# Altium PCB PCB_MiniCVGATEcontroller_2023-04-24.pcbdoc
Units mil, origin at the board's own origin, x right, y up, seen from the top; angles counter-clockwise.
Board outline 5521.01 x 5819.62 mil, 2 copper layers (Top Layer, Bottom Layer); 79 components, 56 nets, 267 pads, 25 vias.
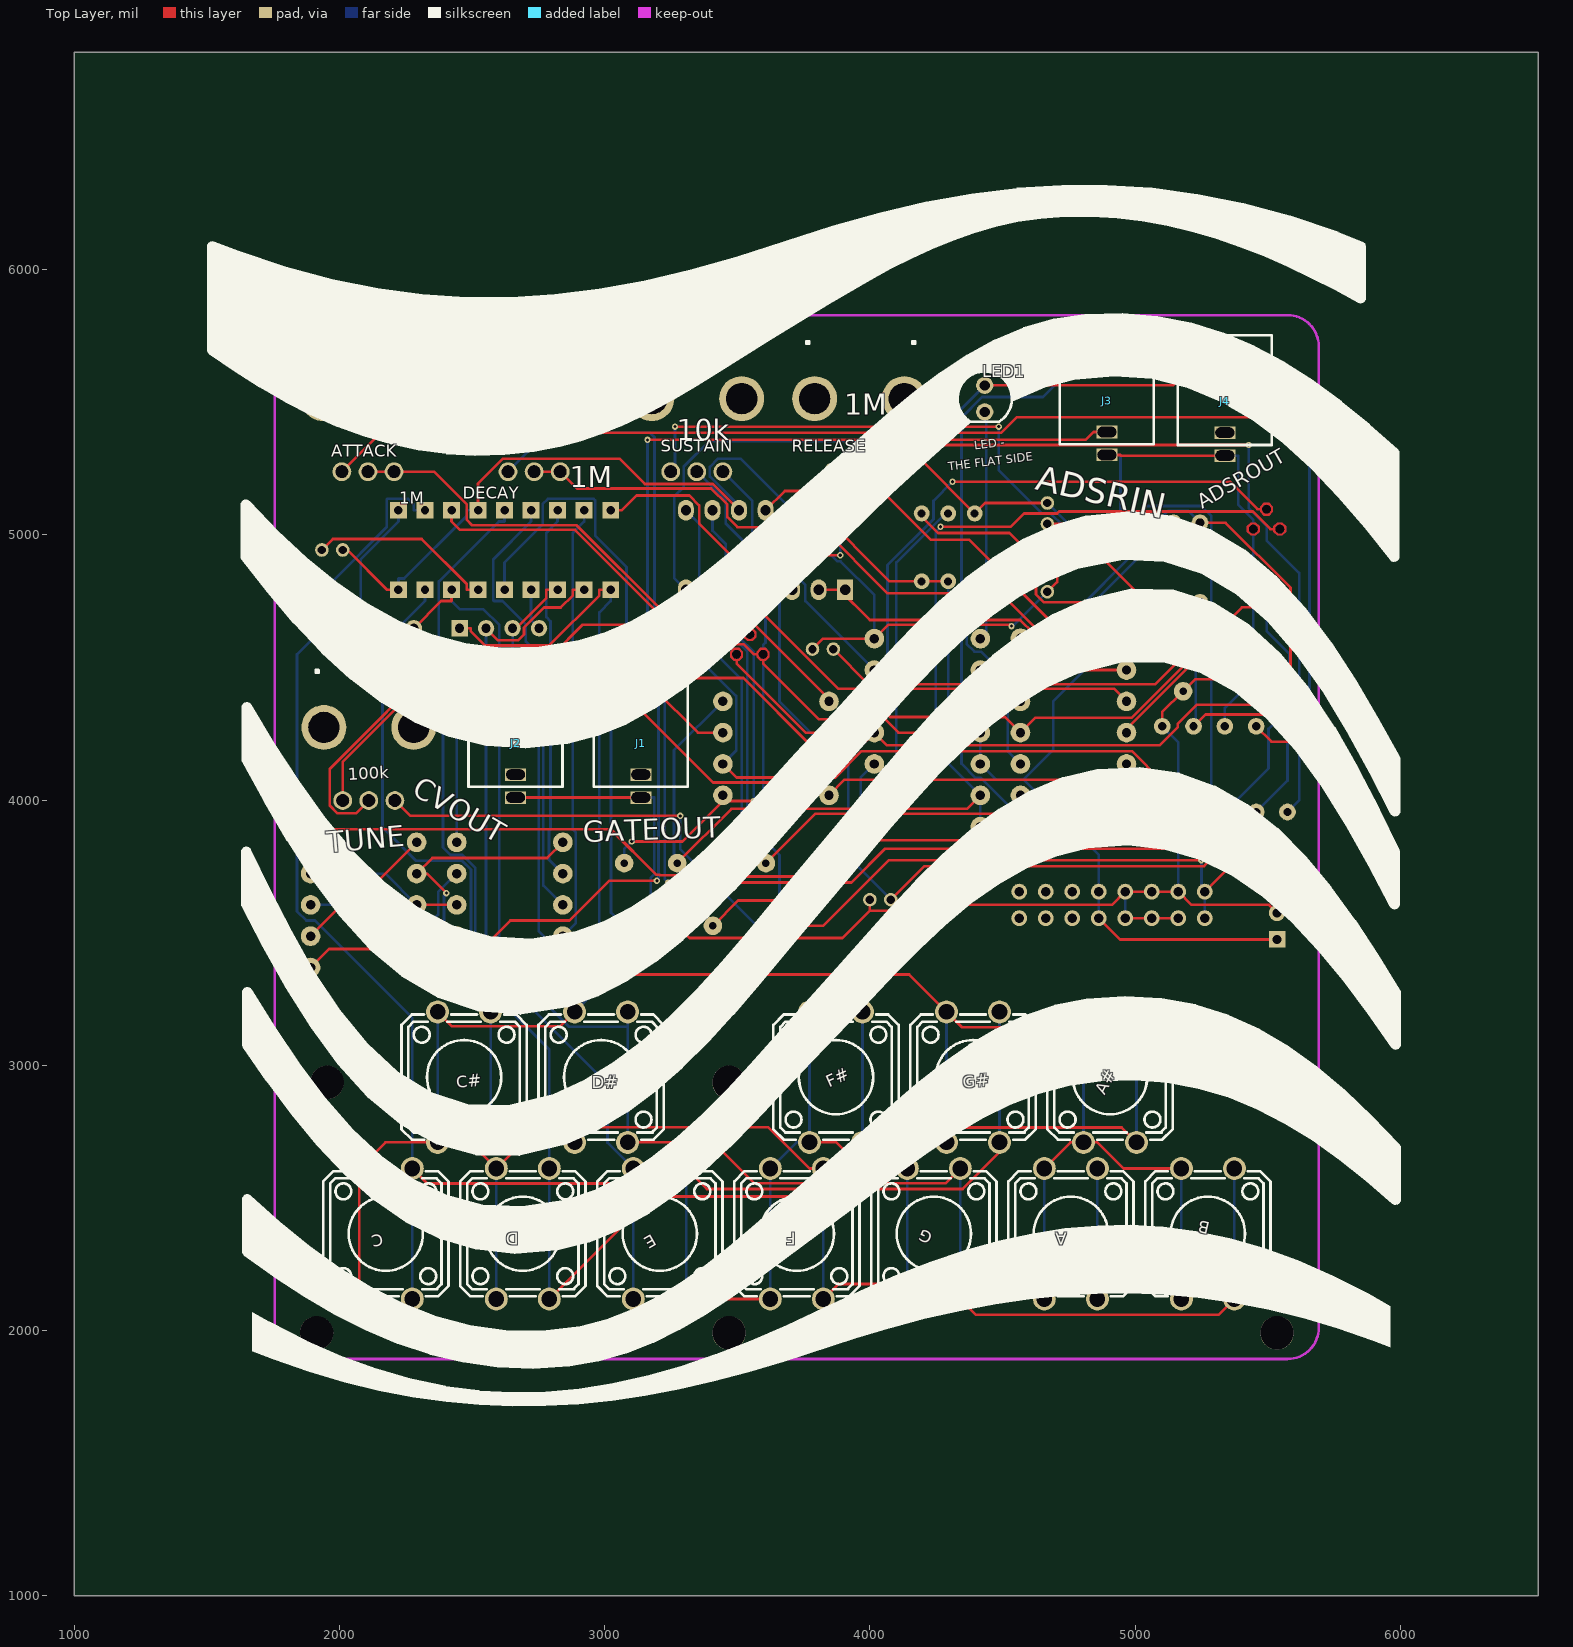
[diagram p0: Top Layer view]
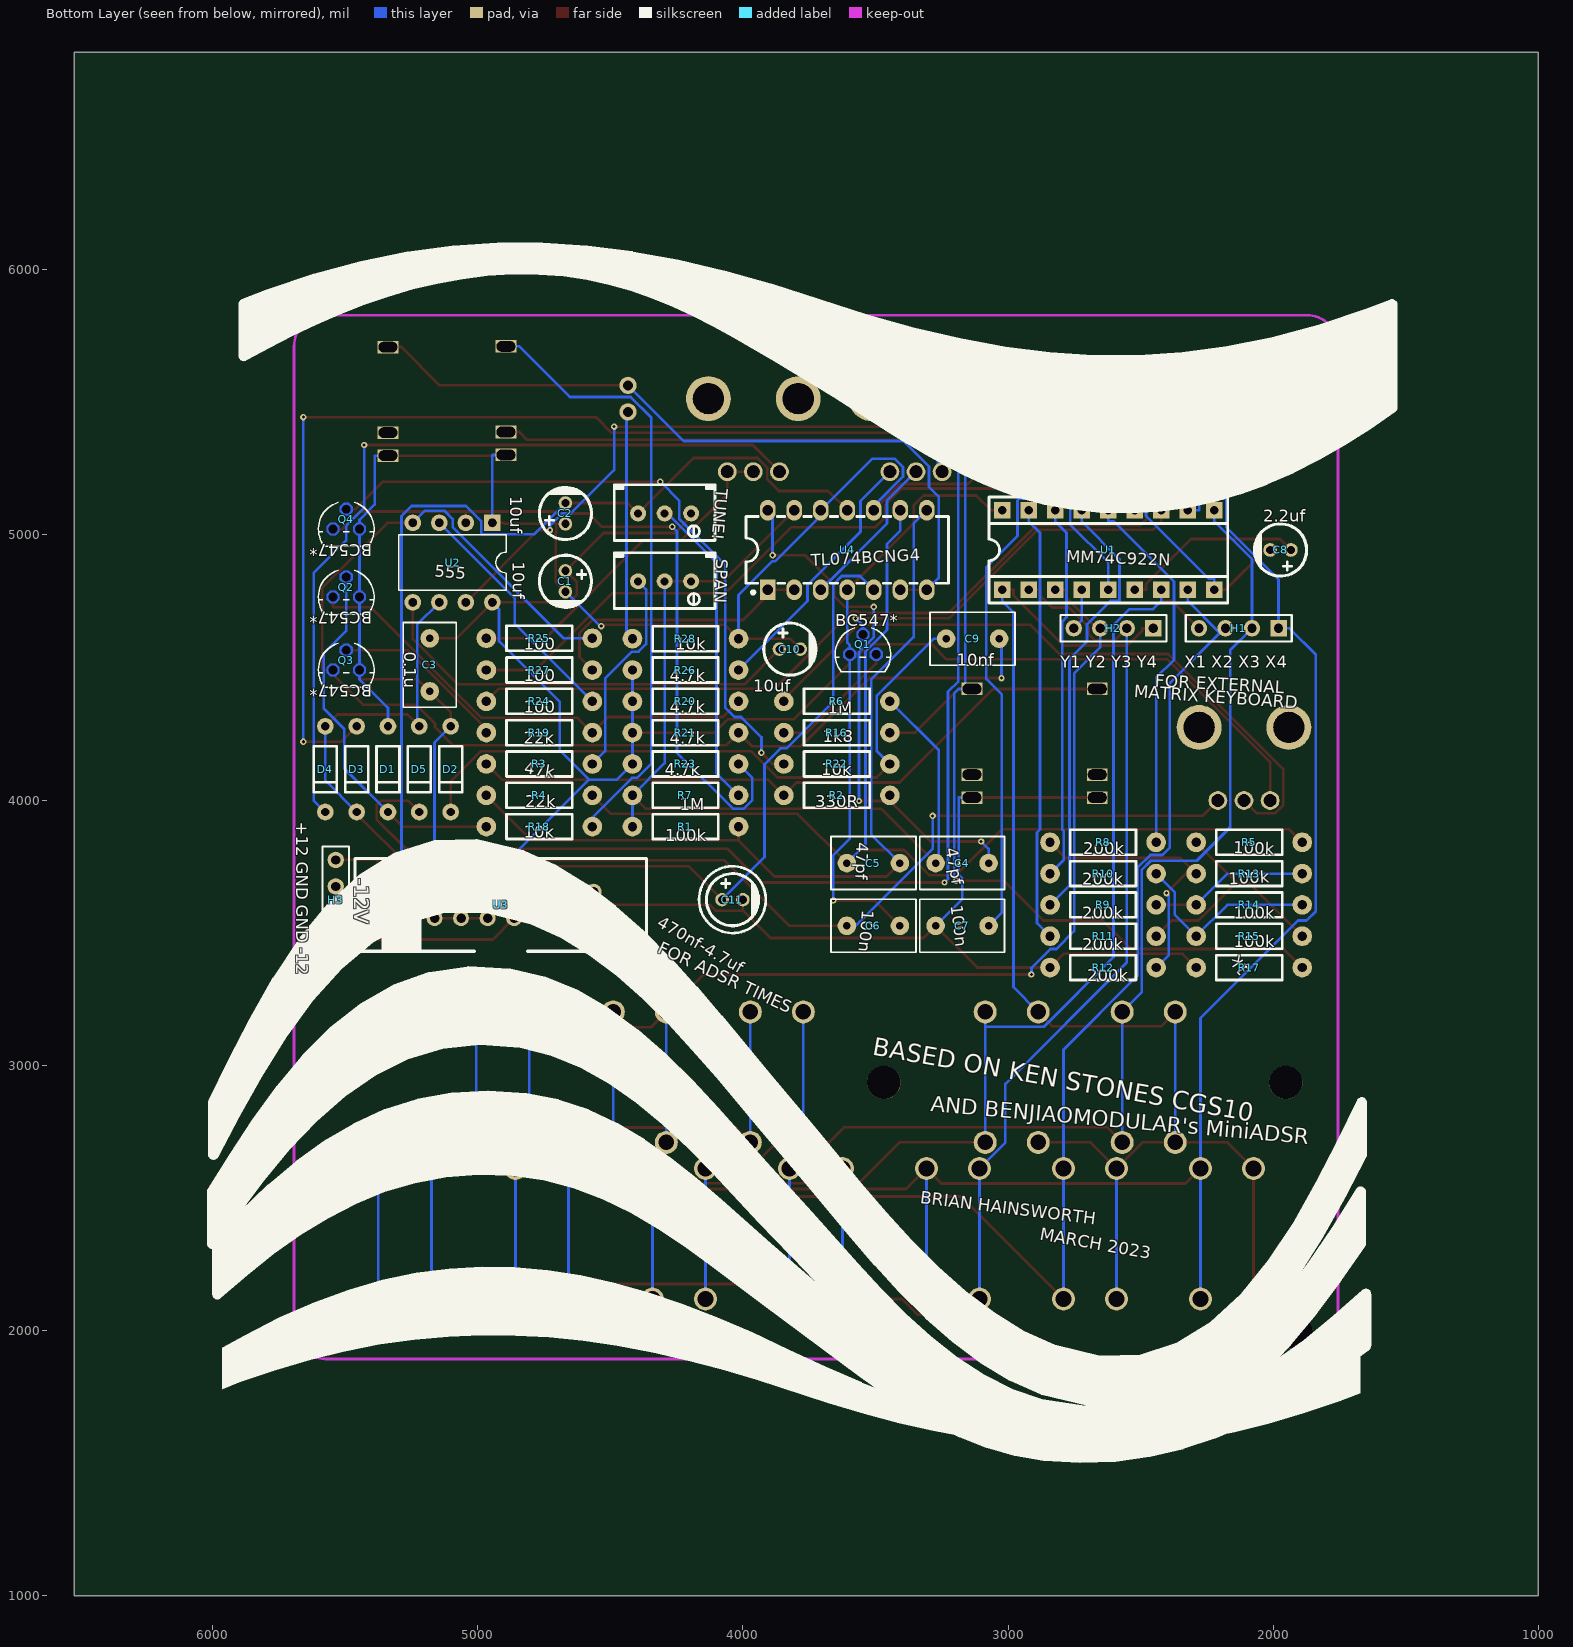
[diagram p1: Bottom Layer view, seen from below]

## Layer stack, top to bottom
Top Layer: signal copper (thickness not stored)
Dielectric: dielectric 12.6, FR-4, Dk 4.8
Bottom Layer: signal copper (thickness not stored)

## Board outline
6521.01,1000 1000,1000 1000,6819.62 6521.01,6819.62

## Components (designator, comment, footprint, x,y, rotation, side; value= is the part's Value field where it differs from the comment)
A "K4-12×12_TH" KEY-TH_4P-L12.0-W12.0-P5.00-LS12.5 4757.91,2364.49 r90 top
A# "K4-12×12_TH" KEY-TH_4P-L12.0-W12.0-P5.00-LS12.5 4905.51,2955.09 r90 top
ATTACK "1M" ALPHA9MMPOT-NOOUTLINE 2106.91,5730.69 r0 top
B "K4-12×12_TH" KEY-TH_4P-L12.0-W12.0-P5.00-LS12.5 5274.61,2364.49 r90 top
C "K4-12×12_TH" KEY-TH_4P-L12.0-W12.0-P5.00-LS12.5 2174.21,2364.49 r90 top
C1 "10uf" CAP-D5.0×F2.0 4669.29,4825.16 r90 bottom
C2 "10uf" CAP-D5.0×F2.0 4669.29,5081.06 r270 bottom
C3 "0.1u" RAD-0.2 5181.1,4510.2 r90 bottom
C4 "47pf" RAD-0.2 3173.23,3762.17 r180 bottom
C5 "47pf" RAD-0.2 3507.87,3762.17 r180 bottom
C6 "100n" RAD-0.2 3507.87,3525.95 r180 bottom
C7 "100n" RAD-0.2 3173.23,3525.95 r180 bottom
C8 "2.2uf" CAP-D5.0×F2.0 1972.44,4943.27 r180 bottom
C9 "10nf" RAD-0.2 3133.86,4608.62 r0 bottom
C10 "10uf" CAP-D5.0×F2.0 3822.83,4569.25 r0 bottom
C11 "470nf-4.7uf" CAP-D5.0×F2.0 4039.37,3624.37 r0 bottom
C# "K4-12×12_TH" KEY-TH_4P-L12.0-W12.0-P5.00-LS12.5 2469.51,2955.09 r90 top
D "K4-12×12_TH" KEY-TH_4P-L12.0-W12.0-P5.00-LS12.5 2690.91,2364.49 r90 top
D1 "1N4148" DO-35_BD2.0-L4.2-P8.20-D0.5-RD 5338.58,4116.5 r270 bottom
D2 "1N4148" DO-35_BD2.0-L4.2-P8.20-D0.5-RD 5102.36,4116.5 r270 bottom
D3 "1N4148" DO-35_BD2.0-L4.2-P8.20-D0.5-RD 5456.69,4116.5 r270 bottom
D4 "1N4148" DO-35_BD2.0-L4.2-P8.20-D0.5-RD 5574.8,4116.5 r270 bottom
D5 "1N4148" DO-35_BD2.0-L4.2-P8.20-D0.5-RD 5220.47,4116.5 r270 bottom
D# "K4-12×12_TH" KEY-TH_4P-L12.0-W12.0-P5.00-LS12.5 2986.21,2955.09 r90 top
DECAY "1M" ALPHA9MMPOT-NOOUTLINE 2733.51,5730.69 r0 top
E "K4-12×12_TH" KEY-TH_4P-L12.0-W12.0-P5.00-LS12.5 3207.71,2364.49 r90 top
F "K4-12×12_TH" KEY-TH_4P-L12.0-W12.0-P5.00-LS12.5 3724.41,2364.49 r90 top
F# "K4-12×12_TH" KEY-TH_4P-L12.0-W12.0-P5.00-LS12.5 3872.01,2955.09 r90 top
G "K4-12×12_TH" KEY-TH_4P-L12.0-W12.0-P5.00-LS12.5 4241.11,2364.49 r90 top
G# "K4-12×12_TH" KEY-TH_4P-L12.0-W12.0-P5.00-LS12.5 4388.81,2955.09 r90 top
H1 "X1 X2 X3 X4" HDR-F-2.54_1X4 2129.92,4647.99 r180 bottom
H2 "Y1 Y2 Y3 Y4" HDR-F-2.54_1X4 2602.36,4647.99 r180 bottom
H3 "+12 GND GND -12" HDR-F-2.54_1X4 5535.43,3624.37 r270 bottom
J1 "GATEOUT" PJ-3001F 3136.02,4251.81 r270 top
J2 "CVOUT" PJ-3001F 2663.52,4251.81 r270 top
J3 "ADSRIN" PJ-3001F 4893.75,5543.66 r270 top
J4 "ADSROUT" PJ-3001F 5338.58,5541.17 r270 top
LED1 "LED-TH-5mm_R" LED-TH_BD5.0_RED 4433.07,5514.13 r0 top
Q1 "BC547*" TO92 3547.24,4549.57 r0 bottom
Q2 "BC547*" TO92 5496.06,4766.1 r0 bottom
Q3 "BC547*" TO92 5496.06,4490.51 r0 bottom
Q4 "BC547*" TO92 5496.06,5022.01 r0 bottom
R1 "100k" R_AXIAL-0.4 4216.53,3899.96 r180 bottom
R2 "330R" R_AXIAL-0.4 3645.67,4018.07 r180 bottom
R3 "47k" R_AXIAL-0.4 4767.71,4136.18 r180 bottom
R4 "22k" R_AXIAL-0.4 4767.71,4018.07 r180 bottom
R5 "100k" R_AXIAL-0.4 2090.55,3840.91 r0 bottom
R6 "1M" R_AXIAL-0.4 3645.67,4372.4 r0 bottom
R7 "1M" R_AXIAL-0.4 4216.53,4018.07 r180 bottom
R8 "200k" R_AXIAL-0.4 2641.73,3840.91 r180 bottom
R9 "200k" R_AXIAL-0.4 2641.73,3604.69 r0 bottom
R10 "200k" R_AXIAL-0.4 2641.73,3722.8 r0 bottom
R11 "200k" R_AXIAL-0.4 2641.73,3486.58 r0 bottom
R12 "200k" R_AXIAL-0.4 2641.73,3368.47 r180 bottom
R13 "100k" R_AXIAL-0.4 2090.55,3722.8 r180 bottom
R14 "100k" R_AXIAL-0.4 2090.55,3604.69 r180 bottom
R15 "100k" R_AXIAL-0.4 2090.55,3486.58 r180 bottom
R16 "1k8" R_AXIAL-0.4 3645.67,4254.29 r180 bottom
R17 "1k" R_AXIAL-0.4 2090.55,3368.47 r0 bottom
R18 "10k" R_AXIAL-0.4 4767.71,3899.96 r180 bottom
R19 "22k" R_AXIAL-0.4 4767.71,4254.29 r180 bottom
R20 "4.7k" R_AXIAL-0.4 4216.53,4372.4 r180 bottom
R21 "4.7k" R_AXIAL-0.4 4216.53,4254.29 r180 bottom
R22 "10k" R_AXIAL-0.4 3645.67,4136.18 r180 bottom
R23 "4.7k" R_AXIAL-0.4 4216.53,4136.18 r180 bottom
R24 "100" R_AXIAL-0.4 4767.71,4372.4 r180 bottom
R25 "100" R_AXIAL-0.4 4767.71,4610.37 r180 bottom
R26 "4.7k" R_AXIAL-0.4 4216.53,4490.51 r180 bottom
R27 "100" R_AXIAL-0.4 4767.71,4490.51 r180 bottom
R28 "10k" R_AXIAL-0.4 4216.53,4608.62 r180 bottom
RELEASE "1M" ALPHA9MMPOT-NOOUTLINE 3960.61,5730.69 r0 top
SPAN "100k" RES-ADJ-TH_3296W 4295.24,4825.19 r90 bottom
SUSTAIN "10k" ALPHA9MMPOT-NOOUTLINE 3347.11,5730.69 r0 top
TUNE "100k" ALPHA9MMPOT-NOOUTLINE 2110.21,4490.49 r0 top
TUNE! "100k" RES-ADJ-TH_3296W 4295.24,5081.09 r90 bottom
U1 "MM74C922N" DIP-18 2622.05,4943.27 r0 bottom
U2 "555" DIP-8_W7.62MM 1047.25,-785.07 r270 bottom
U3 "EURORACK 16 PIN POWER" "EURORACK SHROUDED POWER 16 PIN" 5062.99,3604.69 r90 bottom
U4 "TL074BCNG4" PDIP-14_L19.3-W6.4-P2.54-LS7.9-BL-1 3606.3,4943.27 r0 bottom

## Footprints (in the part's own frame and the unit in brackets; to place one, negate y for a bottom-side part, rotate by r counter-clockwise, add the part's x,y. Pads: shape width x height; smd on the part's side, far side on the other; paste and mask are expansions set on the pad)
ALPHA9MMPOT-NOOUTLINE [mil]
  round 70.87 hole 47.24 slot 47.44 at 0 deg: 1(-98.42,-492.12) 2(0,-492.12) 3(98.42,-492.12)
  round 169.29 hole 116.92 slot 116.93 at 0 deg: 4(169.29,-216.54) 5(-169.29,-216.54)
  silkscreen extent -200,-10 210,0
CAP-D5.0×F2.0 [mm]
  round 1.3 hole 0.8: 1(1,0) 2(-1,0)
  silkscreen extent -2.5,-2.5 2.5,2.5
DIP-8_W7.62MM [mil]
  rect 62.99x62.99 hole 31.5 slot 31.7 at 0 deg: 1(-5830.7,-3897.63)
  round 62.99 hole 31.5 slot 31.7 at 0 deg: 2(-5830.7,-3997.63) 3(-5830.7,-4097.63) 4(-5830.7,-4197.63) 5(-5530.7,-4197.63) 6(-5530.7,-4097.63) 7(-5530.7,-3997.63) 8(-5530.7,-3897.63)
  silkscreen extent -5785,-4250 -5576,-3845
DIP-18 [mil]
  rect 63x63 hole 32: 1(400,150) 2(300,150) 3(200,150) 4(100,150) 5(0,150) 6(-100,150) 7(-200,150) 8(-300,150) 9(-400,150) 10(-400,-150) 11(-300,-150) 12(-200,-150) 13(-100,-150) 14(0,-150) 15(100,-150) 16(200,-150) 17(300,-150) 18(400,-150)
  silkscreen extent -450,-200 450,200
DO-35_BD2.0-L4.2-P8.20-D0.5-RD [mm]
  round 1.6 hole 0.8: 1(4.1,0) 2(-4.1,0)
  silkscreen extent -2.2,-1.1 2.2,1.1
"EURORACK SHROUDED POWER 16 PIN" [mil]
  round 60 hole 36: 1(-50,200) 1(50,200) 2(-50,100) 2(50,100) 3(-50,0) 3(50,0) 4(-50,-100) 4(50,-100) 5(-50,-200) 5(50,-200) 6(-50,-300) 6(50,-300) 7(-50,-400) 7(50,-400) 8(-50,-500) 8(50,-500)
  silkscreen extent -175,-700 175,400
HDR-F-2.54_1X4 [mil]
  rect 62x62 hole 35: 1(150,0)
  round 62 hole 35: 2(50,0) 3(-50,0) 4(-150,0)
  silkscreen extent -200,-50 200,50
KEY-TH_4P-L12.0-W12.0-P5.00-LS12.5 [mm]
  round 2.2 hole 1.5: 1(-6.251,2.54) 2(6.251,2.54) 3(-6.251,-2.54) 4(6.251,-2.54)
  silkscreen extent -5.99,-6 5.99,6
LED-TH_BD5.0_RED [mil]
  round 65 hole 38: 1(0,50) 2(0,-50)
  silkscreen extent -102,-88 102,102
PDIP-14_L19.3-W6.4-P2.54-LS7.9-BL-1 [mm]
  rect 1.5x2 hole 1: 1(7.62,3.81)
  oval 1.5x2 hole 1: 2(5.08,3.81) 3(2.54,3.81) 4(0,3.81) 5(-2.54,3.81) 6(-5.08,3.81) 7(-7.62,3.81) 8(-7.62,-3.81) 9(-5.08,-3.81) 10(-2.54,-3.81) 11(0,-3.81) 12(2.54,-3.81) 13(5.08,-3.81) 14(7.62,-3.81)
  silkscreen extent -9.7,-3.2 9.7,4.21
PJ-3001F [mm]
  rect 1.2x2 hole 1 slot 1.8 at 90 deg: 1(6.15,0) 2(3.95,0) 3(-4.25,0)
  silkscreen extent -5.37,-4.5 5.13,4.5
R_AXIAL-0.4 [mil]
  round 74 hole 35.4: 1(200,0) 2(-200,0)
  silkscreen extent -124,-47 124,47
RAD-0.2 [mil]
  round 70 hole 28: 1(-100,0) 2(100,0)
  silkscreen extent -160,-100 160,100
RES-ADJ-TH_3296W [mil]
  round 60 hole 30: 1(0,-100.01) 2(0,-0.01) 3(0,99.99)
  silkscreen extent -102,-190 108,190
TO92 [mil]
  round 0 hole 32 slot 32.2 at 0 deg: 1(-50,0) 2(0,-75) 3(50,0)
  Top Layer region: -74.02,-9.95 -59.95,-24.02 -40.05,-24.02 -25.98,-9.95 -25.98,9.95 -40.05,24.02 -59.95,24.02 -74.02,9.95
  Top Layer region: -24.02,-84.95 -9.95,-99.02 9.95,-99.02 24.02,-84.95 24.02,-65.05 9.95,-50.98 -9.95,-50.98 -24.02,-65.05
  Top Layer region: 25.98,-9.95 40.05,-24.02 59.95,-24.02 74.02,-9.95 74.02,9.95 59.95,24.02 40.05,24.02 25.98,9.95
  Bottom Layer region: -74.02,-9.95 -59.95,-24.02 -40.05,-24.02 -25.98,-9.95 -25.98,9.95 -40.05,24.02 -59.95,24.02 -74.02,9.95
  Bottom Layer region: -24.02,-84.95 -9.95,-99.02 9.95,-99.02 24.02,-84.95 24.02,-65.05 9.95,-50.98 -9.95,-50.98 -24.02,-65.05
  Bottom Layer region: 25.98,-9.95 40.05,-24.02 59.95,-24.02 74.02,-9.95 74.02,9.95 59.95,24.02 40.05,24.02 25.98,9.95
  silkscreen extent -105,-100 105,65

## Free pads (board coordinates)
  round 125.98 hole 125.98 unplated: ""(1913.39,1990.51) ""(1952.76,2935.39) ""(3468.51,1990.51) ""(3468.51,2935.39) ""(5535.43,1990.51) ""(5535.43,2935.39)

## Via types
v1: diameter 24.02, hole 12.01, Top Layer to Bottom Layer, tented both sides, 25 vias

## Nets (pads, with @x,y where several pads share a name; then routed paths per layer and width w, separated by ;. In a path a pad name is that pad's centre, name@x,y a point inside that pad or via, vN(x,y) a via of type N, cw(c..) or ccw(c..) an arc to the next point about the centre after c; other vN are vias at no path point)
+12: C1.1 C3.2 C6.2 H3.1 Q1.3 R20.2 R21.2 R23.2 R26.2 TUNE!.1 TUNE.1 U1.18 U2.8 U3.5 U4.4 | length 9186.9
  Top Layer w10: TUNE.1 2011.79,4143.01 2399.34,4530.56 3231.89,4530.56 3289.26,4587.93 3523.88,4587.93 3562.24,4549.57 3585.78,4549.57 Q1.3 3597.24,4514.56 3806.47,4305.32 4056.53,4305.32 4107.56,4254.29 R21.2 ; U1.18 3064.53,5093.27 3120.2,5148.93 3318.99,5148.93 3356.3,5111.62 3356.3,5043.27 U4.4 ; C6.2@3407.88,3525.95 3503.03,3621.11 v1(3659.04,3621.11) ; TUNE!.1 4195.24,5069.07 4256.81,5007.51 4526.31,5007.51 C1.1 4626.56,4821.8 4626.56,4775.47 4656.4,4745.63 U2.8 5080.31,4610.2 C3.2 ; U3.5@4862.98,3554.69 4943.31,3474.37 H3.1
  Bottom Layer w10: U4.4 3606.3,4593.65 3597.24,4584.58 Q1.3 3597.24,3854.1 3659.03,3792.3 v1(3659.04,3621.11) ; R26.2 R20.2 R21.2 R23.2 4475.59,4077.13 4579.78,4077.13 ; U3.5@4862.98,3554.69 4862.98,3654.69 4862.98,3793.93 4579.78,4077.13 ; U2.8 4919.65,4720.41 4919.65,4599.43 4691.36,4371.14 4691.36,4188.71 4579.78,4077.13
-12: C2.2 C6.1 H3.4 TUNE!.3 TUNE.3 U3.1 U4.11 | length 7298.5
  Top Layer w10: TUNE.3 2266.47,3940.52 v1(3284.46,3940.52) ; U4.11 3678.99,5165.95 3864.28,5165.95 3908.68,5210.35 3908.68,5254.43 3944.38,5290.12 4186.22,5290.12 TUNE!.3 4434.59,5120.43 C2.2 ; C6.1@3607.88,3525.95 3823.61,3525.95 4071.34,3773.69 v1(5250.26,3773.69) ; U3.1@5262.98,3654.69 5382.66,3774.37 H3.4
  Bottom Layer w10: v1(3284.46,3940.52) 3284.45,3816.08 3574.59,3525.95 C6.1@3607.88,3525.95 ; C2.2 4786.64,5003.08 4984.52,5003.08 4987.44,5005.99 4987.44,5051.66 5044.94,5109.17 5249.15,5109.17 5287.77,5070.55 5287.77,3811.2 v1(5250.26,3773.69) 5250.26,3667.42 5262.98,3654.69 U3.1@5262.98,3554.69
ATTACK_1: ATTACK.1 D3.2 | length 5183.4
  Top Layer w10: ATTACK.1 2155.05,5385.13 4495.19,5385.13 4554.4,5444.34 v1(5657.75,5444.34) ; D3.2 5514.27,4220.34 v1(5657.75,4220.34)
  Bottom Layer w10: v1(5657.75,4220.34) v1(5657.75,5444.34)
C5_1: C5.1 R4.1 R5.2 U4.9 | length 4350.4
  Top Layer w10: R5.2 1939.63,3889.98 3022.59,3889.98 3193.59,3718.98 3205.99,3718.98 3208.86,3716.1 3296.66,3716.1 3392.53,3811.96 3558.07,3811.96 C5.1 3793.72,3948.01 4497.64,3948.01 R4.1
  Bottom Layer w10: U4.9 3406.3,5015.98 3456.3,4965.98 3456.3,4641.8 3537.55,4560.55 3537.55,3832.47 C5.1
C9_2: C9.2 D2.1 R22.1 | length 2509.8
  Top Layer w10: R22.1 3496.66,4085.18 3869.41,4085.18 3968.64,4184.41 4988.2,4184.41 5102.35,4070.26 D2.1
  Bottom Layer w10: C9.2 3279.8,4608.62 3495.51,4392.9 3495.51,4186.03 R22.1
CVOUT: J2.3 R2.2 R3.2 | length 2519.2
  Top Layer w10: J2.3 3056.11,4419.13 3409.11,4066.14 3797.61,4066.14 R2.2 3904.72,4077.13 4908.66,4077.13 R3.2
DECAY_1: D5.1 DECAY.1 | length 4800.4
  Top Layer w10: v1(3239.8,3689.37) 3930.49,3689.37 4057.62,3816.5 5270.85,3816.5 5381.38,3927.02 5381.38,3981.38 5365.11,3997.64 5263.02,3997.64 D5.1
  Bottom Layer w10: DECAY.1 2781.66,5385.15 3170.8,5385.15 3187.57,5368.37 3187.57,4448 3226.28,4409.3 3226.28,3702.89 v1(3239.8,3689.37)
GATEOUT: J1.3 J3.2 R16.1 R17.2 | length 5286.3
  Top Layer w10: R17.2 1960.61,3438.51 2536.49,3438.51 2643.64,3545.67 2867.05,3545.67 3017.3,3695.92 v1(3196.43,3695.92) ; J1.3 3186.39,4419.13 3351.22,4254.29 R16.1 ; v1(3161.21,5358.38) 4813.61,5358.38 4843.39,5388.15 J3.2
  Bottom Layer w10: J1.3 J1.3@3161.2,4419.13 ; v1(3161.21,5358.38) J1.3@3161.2,4419.13 ; v1(3196.43,3695.92) 3202.45,3701.94 3202.45,4403.07 3186.39,4419.13 J1.3@3161.2,4419.13
GND: C1.2 C2.1 C3.1 C7.1 C8.2 C10.2 C11.2 D1.2 D2.2 H3.2 H3.3 J1.1 J2.1 J3.1 J4.1 Q2.1 Q3.1 Q4.1 R12.2 R17.1 R28.1 U1.9 U1.13 U2.1 U3.2 U3.3 U3.4 U4.10 U4.12 | length 12695.1
  Top Layer w10: C8.2 2029.56,4943.27 2179.55,4793.27 U1.9 ; R17.1 2342.24,3420.14 2790.07,3420.14 R12.2 3115.74,3368.47 3273.22,3525.95 3319.57,3479.61 3896.55,3479.61 3999.99,3583.05 ; U1.13 2522.05,5193.51 2616.18,5287.64 3055.41,5287.64 3150.97,5192.07 3407.51,5192.07 U4.10 ; J2.1 J1.1 ; C10.2@3783.47,4569.26 3822.82,4608.62 R28.1 4069.3,4661.38 4528.85,4661.38 v1(4534.01,4656.23) ; C11.2 3999.99,3583.05 ; C1.2 4705.94,4822.44 4705.94,5006.97 4704.24,5008.67 4704.24,5041.69 ; C2.1 4704.24,5041.69 ; J3.1 4944.1,5301.53 4946.59,5299.05 J4.1@5338.57,5299.05 ; U2.1 4902.4,5045.63 4898.45,5041.69 4704.24,5041.69 ; U3.4@4962.98,3554.69 5062.98,3554.69 U3.2@5162.98,3554.69 ; D2.2 5102.35,4331.46 C3.1 5226.4,4455.51 5446.06,4455.51 Q3.1 ; H3.2 5505.1,3604.69 5212.98,3604.69 5162.98,3654.69 5062.98,3654.69 4962.98,3654.69 4912.98,3604.69 4124.32,3604.69 4102.69,3583.05 3999.99,3583.05
  Bottom Layer w10: U1.9 2222.05,4835.76 2243.28,4835.76 2479.55,5072.03 2479.55,5093.27 U1.13 ; J1.1 3186.39,4009.68 3186.39,3718.49 3173.36,3705.47 3173.36,3625.81 C7.1@3273.22,3525.95 ; U4.10 3506.3,5110.05 3396.32,5220.04 3396.32,5256.17 3427.84,5287.69 3511.89,5287.69 U4.12 3706.3,5072.57 3878.57,4900.31 3889.7,4900.31 4016.53,4773.48 R28.1 ; v1(4534.01,4656.23) 4539.73,4656.23 C1.2 ; J3.1 4944.1,5301.53 4944.88,5300.76 U2.1 ; U3.4@4962.98,3554.69 U3.4@4962.98,3654.69 ; D2.2 5162.98,4217.29 U3.2@5162.98,3654.69 ; D1.2 5338.57,4348.03 5446.06,4455.51 Q3.1 Q2.1 Q4.1 5446.06,5057.02 5388.94,5114.14 5388.94,5299.05 J4.1@5338.57,5299.05 ; H3.2 H3.3
J3_3: J3.3 R18.1 | length 2305.7
  Bottom Layer w10: R18.1 4567.72,3934.87 4418.65,4083.93 4398.88,4083.93 4345.24,4137.56 4345.24,5441.94 4423.38,5520.07 4652.48,5520.07 4843.39,5710.98 J3.3
LED1_2: LED1.2 R28.2 | length 867.2
  Bottom Layer w10: R28.2 4438.89,4630.97 4438.89,5458.31 LED1.2
Q1_1: Q1.1 R16.2 | length 491.3
  Top Layer w10: Q1.1 3497.24,4514.56 3757.51,4254.29 R16.2
Q2_3: Q2.3 R19.1 R20.1 | length 1810.9
  Top Layer w10: R20.1 4075.59,4313.35 4508.65,4313.35 R19.1 4623.48,4310.05 4986.72,4310.05 5403.51,4726.84 5541.8,4726.84 5546.06,4731.1 Q2.3
Q3_3: C9.1 Q3.3 R21.1 R25.1 U2.4 | length 4667.8
  Top Layer w10: v1(3024.74,4460.16) 3523.39,4460.16 3780.51,4203.04 3965.28,4203.04 R21.1 4064.59,4206.23 5092.73,4206.23 5161.41,4274.92 5161.41,4288.12 5233.4,4360.11 5433.16,4360.11 5563.56,4490.51 ; U2.4 5341.19,5045.63 5585.91,4800.9 5585.91,4495.36 5581.06,4490.51 5563.56,4490.51 ; Q3.3 5563.56,4490.51
  Bottom Layer w10: v1(3024.74,4460.16) 3024.74,4599.5 C9.1 ; R25.1 4676.02,4610.37 5094.88,5029.23 5094.88,5060.26 5126.35,5091.74 5198.77,5091.74 U2.4
Q4_3: Q4.3 R23.1 U2.2 | length 2775.8
  Top Layer w10: v1(4266.36,5030.57) 4530.61,5030.57 4581.1,5081.06 4705.94,5081.06 4713.06,5088.19 5044.88,5088.19 ; U2.2 5044.88,5088.19 ; Q4.3 5511.05,5022.01 5444.86,5088.19 5044.88,5088.19
  Bottom Layer w10: R23.1 3965.05,4084.69 3965.05,3999.07 3996.64,3967.48 4038.24,3967.48 4248.52,4177.75 4248.52,5012.73 v1(4266.36,5030.57)
R1_1: C5.2 R1.1 R4.2 U4.8 | length 3222.7
  Top Layer w10: C5.2 3458.43,3711.6 3880.18,3711.6 4016.53,3847.96 ; R1.1 4016.53,3847.96 ; R4.2 4797.59,3847.96 4016.53,3847.96
  Bottom Layer w10: U4.8 3356.3,5043.27 3356.3,4614.64 3516.26,4454.68 3516.26,3870.56 C5.2
R1_2: C4.1 R1.2 R6.2 R7.2 SPAN.1 SPAN.2 U4.13 | length 3516.2
  Top Layer w10: C4.1 3478.12,3967.07 4365.52,3967.07 R7.2 ; U4.13 4074.39,4825.19 SPAN.1 SPAN.2
  Bottom Layer w10: C4.1 3261.39,3774 3261.39,4188.14 R6.2 ; SPAN.2 4295.24,4139.37 R7.2 R1.2
R2_1: C4.2 R2.1 U4.14 | length 2058.4
  Top Layer w10: v1(3101.5,3843.68) 3292.74,3843.68 R2.1@3445.66,3996.6 ; R2.1 R2.1@3445.66,3996.6 ; v1(3506.81,4728.77) 3615.01,4728.77 3656.28,4770.04 3656.28,4813.17 3766.49,4923.37 v1(3888.12,4923.37) ; v1(3562.17,3996.6) R2.1@3445.66,3996.6
  Bottom Layer w10: C4.2 3073.22,3815.41 v1(3101.5,3843.68) ; v1(3506.81,4728.77) 3506.8,4614.01 3562.16,4558.65 v1(3562.17,3996.6) ; v1(3888.12,4923.37) 3888.11,5075.08 U4.14
R3_1: R3.1 SPAN.3 | length 800.3
  Bottom Layer w10: SPAN.3 4364.98,4794.93 4364.98,4588.72 4393.68,4560.03 4418.88,4560.03 4519.65,4459.25 4519.65,4184.24 R3.1
R5_1: R5.1 R11.2 R15.1 | length 933.8
  Top Layer w10: R15.1 2092.8,3688.82 2138.47,3688.82 ; R5.1 2138.47,3688.82 2281.66,3545.63 2382.68,3545.63 R11.2
R6_1: R6.1 TUNE.2 | length 2550.5
  Top Layer w10: TUNE.2 2061.97,3950.14 1992.56,3950.14 1962.82,3979.88 1962.82,4118.02 2395.95,4551.15 2806.41,4551.15 2916.99,4661.72 3564.47,4661.72 3845.66,4380.53 R6.1
R7_1: R7.1 TUNE!.2 | length 1184.9
  Bottom Layer w10: R7.1 4099.55,4101.09 4099.55,4896.37 4284.27,5081.09 TUNE!.2
R8_2: R8.2 R12.1 R13.2 | length 1047
  Top Layer w10: v1(2402.6,3649.32) 2329.12,3722.79 R13.2 2349.61,3781.85 2782.68,3781.85 R8.2
  Bottom Layer w10: v1(2402.6,3649.32) 2393.68,3640.4 2393.68,3416.53 R12.1
R9_2: R9.2 R13.1 R14.2 | length 600.1
  Top Layer w10: R14.2 R9.2
  Bottom Layer w10: R13.1 2172.45,3722.79 R14.2
R10_2: R10.2 R14.1 R15.2 | length 747.8
  Bottom Layer w10: R14.1 2172.45,3604.68 R15.2 2371.68,3567.7 2371.68,3652.74 R10.2
R18_2: D1.1 Q2.2 R18.2 | length 1415.5
  Top Layer w10: R18.2 5283.45,3899.96 D1.1
  Bottom Layer w10: D1.1 5503.48,4119.99 5503.48,4268.65 5581.18,4346.34 5581.18,4552.19 5496.06,4637.31 Q2.2
R19_2: Q3.2 R19.2 | length 665.5
  Top Layer w10: R19.2 4967.72,4268.34 5264.89,4565.51 Q3.2
R22_2: Q4.2 R22.2 | length 2524.4
  Top Layer w10: R22.2 3887.8,4136.18 v1(3930.14,4178.52) ; v1(4311.66,5200.89) 5357.16,5200.89 5461.05,5097.01 Q4.2
  Bottom Layer w10: v1(3930.14,4178.52) 3930.14,4236.69 4006.78,4313.34 4031.66,4313.34 4066.22,4347.89 4066.22,4885.75 4239.57,5059.11 4239.57,5128.81 v1(4311.66,5200.89)
R24_2: ATTACK.2 ATTACK.3 R24.2 | length 3260.1
  Top Layer w10: ATTACK.2 ATTACK.3 2356.86,5238.57 2479.2,5116.23 2479.2,5057.4 2500.11,5036.5 2893.64,5036.5 3224.68,4705.46 3562.59,4705.46 3569.84,4712.72 3587.68,4712.72 3879.93,4420.46 4919.65,4420.46 R24.2
R27_2: DECAY.2 DECAY.3 R27.2 | length 2571.8
  Top Layer w10: DECAY.2 DECAY.3 2895.32,5175.17 3401.57,5175.17 3462.03,5114.71 3462.03,5067.37 3500.11,5029.29 3816.53,5029.29 4065.32,4780.49 4491.93,4780.49 4781.9,4490.51 R27.2
RELEASE_1: D4.1 RELEASE.1 | length 3089.1
  Top Layer w10: RELEASE.1 3962.89,5339.28 v1(5428.53,5339.28)
  Bottom Layer w10: v1(5428.53,5339.28) 5428.52,5101.68 5496.06,5034.15 5496.06,4979.12 5618.57,4856.6 5618.57,3998.86 D4.1
RELEASE_2: R25.2 RELEASE.2 RELEASE.3 | length 1317.9
  Top Layer w10: RELEASE.2 RELEASE.3 4059.03,5152.15 4229.07,4982.1 4372.99,4982.1 4744.73,4610.37 R25.2
S$133: 
SUSTAIN_3: R26.1 SUSTAIN.3 | length 984.6
  Bottom Layer w10: SUSTAIN.3 3556.3,5127.79 3556.3,5012.01 3756.3,4812.01 3756.3,4750.74 R26.1
U1_5: C7.2 U1.5 | length 2288.9
  Bottom Layer w10: U1.5 2622.05,4895.61 2765.88,5039.44 2765.88,5115.82 2785.88,5135.82 2958.12,5135.82 2964.62,5129.32 2964.62,4996.33 3082.22,4878.74 3082.22,4456.11 3023.47,4397.36 3023.47,3575.71 C7.2@3073.22,3525.95
U1_6: C8.1 U1.6 | length 697.7
  Top Layer w10: C8.1 1974.37,4984.56 2309.51,4984.56 2479.55,4814.51 2479.55,4793.27 U1.6
U1_12: Q1.2 U1.12 | length 1420.1
  Top Layer w10: U1.12 2422.05,5050.78 2453.59,5019.24 2888.18,5019.24 3222.22,4685.21 v1(3574.94,4685.21)
  Bottom Layer w10: Q1.2 3547.24,4659.58 3549.3,4659.58 v1(3574.94,4685.21)
U1_14: R8.1 U1.14 | length 1395.4
  Bottom Layer w10: R8.1 2441.74,4461.55 2374.24,4529.04 2374.24,4824.23 2600.8,5050.78 2622.05,5050.78 U1.14
U1_15: R9.1 U1.15 | length 1674.9
  Bottom Layer w10: U1.15 2722.05,5050.78 2579.49,4908.22 2579.49,4753.62 2582.39,4750.71 2614.2,4750.71 2702.36,4662.55 2702.36,4598.03 2768.39,4532 2768.39,3678.02 R9.1
U1_16: R10.1 U1.16 | length 1418.8
  Bottom Layer w10: U1.16 2822.05,5050.78 2779.49,5008.22 2779.49,4690.05 2795.47,4674.07 2795.47,3888.92 2789.55,3883.01 2789.55,3774.97 R10.1
U1_17: R11.1 U1.17 | length 1649.3
  Bottom Layer w10: R11.1 2890.82,3535.67 2890.82,3877.62 2879.49,3888.96 2879.49,5008.22 2922.05,5050.78 U1.17
U2_3: R24.1 U2.3 | length 912.3
  Bottom Layer w10: R24.1 4860.93,4665.61 4860.93,4761.68 U2.3
U2_5: C10.1 U2.5 | length 1646.9
  Top Layer w10: C10.1@3862.2,4569.26 3994.76,4436.71 5074.93,4436.71 5244.88,4606.66 U2.5
U2_7: SUSTAIN.1 U2.7 | length 2337.1
  Top Layer w10: v1(3265.01,5408.59) v1(4485.65,5408.59) ; v1(4727.31,5018.22) 4772.28,5018.22 U2.7
  Bottom Layer w10: SUSTAIN.1 3265.01,5254.89 v1(3265.01,5408.59) ; v1(4485.65,5408.59) 4485.65,5245.13 4649.72,5081.06 4681.74,5081.06 4727.31,5035.5 v1(4727.31,5018.22)
U4_1: R27.1 U4.1 U4.2 | length 1057.5
  Top Layer w10: U4.2 3865.78,4793.27 ; 3865.78,4793.28 U4.1@3886.03,4793.28 ; U4.1 U4.1@3886.03,4793.28 ; R27.1 4616.44,4539.24 4616.44,4629.67 4566.82,4679.29 4000.03,4679.29 U4.1@3886.03,4793.28
U4_3: SUSTAIN.2 U4.3 | length 594.1
  Bottom Layer w10: SUSTAIN.2 3456.3,5129.37 3456.3,5043.27 U4.3
U4_5: C11.1 D3.1 D4.2 D5.2 U2.6 U4.5 | length 4351.1
  Top Layer w10: C11.1 4204.98,3750.63 5259.81,3750.63 5456.69,3947.5 D3.1 ; D5.2 5265.48,4322.93 5529.78,4322.93 D4.2
  Bottom Layer w10: U4.5 3557.88,4844.84 3627.24,4844.84 3659.18,4812.9 3659.18,4372.06 3836.01,4195.23 3858.41,4195.23 3918.61,4135.03 3918.61,3784.51 C11.1 ; U2.6 5228.27,4662.23 5228.27,4285.73 D5.2 ; D3.1 5574.8,4073.19 D4.2
U4_7: J4.3 LED1.1 U4.6 U4.7 | length 2825.4
  Top Layer w10: U4.7 U4.6 ; LED1.1 5143.85,5564.13 5288.22,5708.5 J4.3
  Bottom Layer w10: U4.7 3261.74,4837.83 3261.74,5145.01 3297.89,5181.16 3297.89,5257.84 3394.47,5354.42 4223.35,5354.42 LED1.1
X1: C.3 C.4 E.3 E.4 G#.3 G#.4 H1.1 U1.11 | length 6925.4
  Top Layer w10: C.4 2330.55,2554.24 3251.36,2554.24 E.4 3384.86,2533.43 4349.89,2533.43 4488.81,2672.35 G#.3
  Bottom Layer w10: C.3 C.4 2274.2,3177.97 1906.55,3545.63 1874.46,3545.63 1839.59,3580.51 1839.59,4549.65 1937.93,4648 H1.1 1979.91,4831.36 2177.78,5029.22 2177.78,5132.92 2180.68,5135.83 2258.24,5135.83 2279.55,5114.51 2279.55,5093.27 U1.11 ; E.3 E.4 ; G#.3 G#.4
X2: A.3 A.4 C#.3 C#.4 F.3 F.4 H1.2 U1.10 | length 6155.3
  Top Layer w10: C#.3 2626.8,2766.28 3616.32,2766.28 3772.01,2610.59 F.4 ; F.3 3880.76,2174.74 4801.56,2174.74 A.3
  Bottom Layer w10: U1.10 2222.05,5050.78 2079.91,4908.65 H1.2 2162.01,4565.9 2162.01,3897.54 2288.36,3771.19 2461.88,3771.19 2495.32,3737.75 2495.32,3275.38 C#.4 C#.3 ; F.3 F.4 ; A.3 A.4
X3: A#.3 A#.4 D.3 D.4 F#.3 F#.4 H1.3 U1.8 | length 6620.2
  Top Layer w10: D.3 3177.55,2505.04 v1(3948.1,2505.04) ; F#.3 4028.36,2765.34 4949.15,2765.34 A#.3
  Bottom Layer w10: H1.3 2184.07,4647.99 H1.3@2201.66,4630.4 ; U1.8 2322.05,4750.78 H1.3@2201.66,4630.4 ; D.3 D.4 2790.91,3058.46 2511.39,3337.98 2511.39,3745.03 2463.59,3792.83 2418.16,3792.83 2389.82,3821.17 2389.82,4442.24 H1.3@2201.66,4630.4 ; v1(3948.1,2505.04) 3948.09,2685.08 F#.3 F#.4 ; A#.3 A#.4
X4: B.3 B.4 D#.3 D#.4 G.3 G.4 H1.4 U1.7 | length 6234
  Top Layer w10: H1.4 2382.7,4750.78 2422.05,4750.78 U1.7 ; D#.3 3409.72,2708.99 3564.41,2554.3 4284.81,2554.3 G.4 ; G.3 4400.55,2058.95 5315.16,2058.95 B.3
  Bottom Layer w10: U1.7 2422.05,4750.78 2452.57,4720.25 2541.62,4720.25 2602.36,4659.51 2602.36,3407.32 2864.49,3145.2 3086.2,3145.2 ; D#.3 3086.2,3145.2 ; D#.4 3086.2,3145.2 ; G.3 G.4 ; B.3 B.4
Y1: C#.1 C#.2 C.1 C.2 D#.1 D#.2 D.1 D.2 H2.1 U1.1 | length 5323.2
  Top Layer w10: C.1 C.2 2172.61,2708.99 C#.1 2492.51,2708.99 D.2 2689.3,2708.99 D#.1 ; C#.2 2423.88,3146.82 2831.84,3146.82 D#.2 ; H2.1 2494.36,4648 2494.36,4637.5 2548.78,4583.07 2790.59,4583.07 2979.55,4772.03 2979.55,4793.27 U1.1
  Bottom Layer w10: C#.1 C#.2 ; D.1 D.2 ; D#.2 2979.55,3294.54 2979.55,4708.29 3022.05,4750.78 U1.1
Y2: E.1 E.2 F#.1 F#.2 F.1 F.2 G.1 G.2 H2.2 U1.2 | length 5894.2
  Top Layer w10: H2.2 2597.93,4602.43 2672.68,4602.43 2695.32,4625.06 2695.32,4650.43 2770.93,4726.05 2833.57,4726.05 2879.55,4772.03 2879.55,4793.27 U1.2 ; E.1 3165.89,2060.21 3341.89,2060.21 3400.07,2118.39 F.1 ; F#.1 3873.61,2708.99 3972.01,2610.59 G.2
  Bottom Layer w10: H2.2 2552.36,3387.89 3010.47,2929.78 3010.47,2707.82 E.2 E.1 ; F.1 F.2 3722.8,2708.99 F#.1 F#.2 ; G.1 G.2
Y3: A#.1 A#.2 A.1 A.2 B.1 B.2 G#.1 G#.2 H2.3 U1.3 | length 6241.2
  Top Layer w10: H2.3 2664.57,4647.99 2779.55,4762.98 2779.55,4793.27 U1.3 ; v1(2911.88,3342.24) 4147.76,3342.24 G#.2 4346.69,3143.3 4747.61,3143.3 A#.2 ; A.2 4756.31,2708.99 A#.1 4857.9,2708.99 4956.31,2610.59 B.2
  Bottom Layer w10: H2.3 2652.36,4576.02 2750.91,4477.48 2750.91,3505.37 2817.76,3438.52 2840.57,3438.52 2911.88,3367.21 v1(2911.88,3342.24) ; G#.1 G#.2 ; A.1 A.2 ; A#.1 A#.2 ; B.1 B.2
Y4: H2.4 U1.4 | length 157.8
  Bottom Layer w10: U1.4 2722.05,4678.3 H2.4
pads on no net: ATTACK.4 ATTACK.5 DECAY.4 DECAY.5 J1.2 J2.2 J4.2 RELEASE.4 RELEASE.5 SUSTAIN.4 SUSTAIN.5 TUNE.4 TUNE.5 U3.6 U3.7 U3.8

## Keep-outs
Keep-Out Layer:
  lines w10: 1755.91,2010.2 ccw(c1874.02,2010.2) 1874.02,1892.09 ; 1755.91,5710.98 cw(c1874.02,5710.98) 1874.02,5829.09 ; 5574.8,1892.09 ccw(c5574.8,2010.2) 5692.91,2010.2 ; 5574.8,5829.09 cw(c5574.8,5710.98) 5692.91,5710.98

## Silkscreen, mask and mechanical layers (free items; w line width, h text height)
Top Overlay:
  drawing of 8 lines, arcs and shapes, not listed
  text "LED -" at 4395.62,5321.33 h31.5 r7
  text "THE FLAT SIDE" at 4297.2,5242.59 h31.5 r7
Bottom Overlay:
  drawing of 6 lines, arcs and shapes, not listed
  text "FOR EXTERNAL" at 2446.12,4427.55 h47.24 r3
  text "MATRIX KEYBOARD" at 2525.27,4388.21 h47.24 r4
  text "FOR ADSR TIMES" at 4324.94,3425.79 h47.24 r25
  text "BASED ON KEN STONES CGS10" at 3513.69,3040.24 h66.93 r10
  text "AND BENJIAOMODULAR's MiniADSR" at 3293.91,2827.24 h59.05 r5
  text "BRIAN HAINSWORTH" at 3333.59,2478.88 h47.24 r7
  text "MARCH 2023" at 2882.06,2341.27 h47.24 r10

## Text inside footprints (layer, text, board x,y; h text height)
Q1: Document "2" at 3572.24,4624.56 h50 r180; Document "3" at 3632.24,4599.56 h50 r180; Document "1" at 3502.24,4599.56 h50 r180
Q2: Document "2" at 5521.06,4841.09 h50 r180; Document "3" at 5581.06,4816.09 h50 r180; Document "1" at 5451.06,4816.09 h50 r180
Q3: Document "2" at 5521.06,4565.5 h50 r180; Document "3" at 5581.06,4540.5 h50 r180; Document "1" at 5451.06,4540.5 h50 r180
Q4: Document "2" at 5521.06,5097 h50 r180; Document "3" at 5581.06,5072 h50 r180; Document "1" at 5451.06,5072 h50 r180
U2: Document "U1" at 5075.19,4927.11 h39.37 r270
U3: Bottom Overlay "-12V" at 5465.55,3704.68 h55.12 r90